# EAGLE board sht21_board_small (EAGLE 7.2.0)
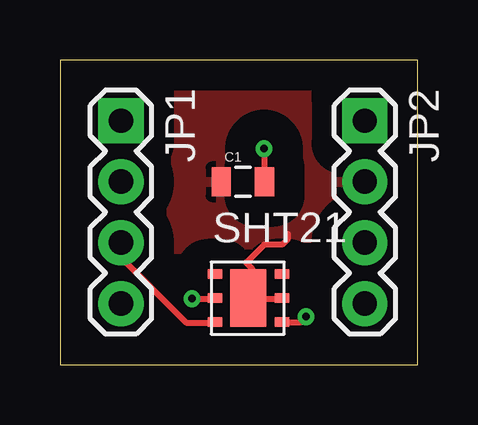
[diagram p0: board, top side]
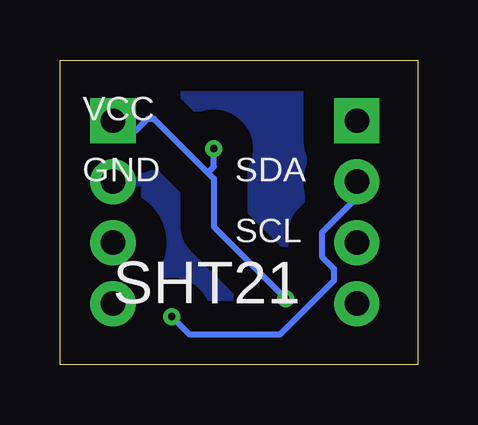
[diagram p1: board, bottom side, seen from below]

Size 14.91 x 12.69 mm. Coordinates in mm from the lower left corner, seen from the top.
Outline: 0,0 14.91,0 14.91,12.69 0,12.69 0,0
Copper layers (1*16): Top 0.035mm / dielectric 1.5mm / Bottom 0.035mm
Design rules "default *": minimum track width 0.25mm, minimum drill 0.3mm, track to track 0.25mm, track to pad 0.25mm, pad to pad 0.25mm, via to via 0.25mm, smd to smd 0.25mm, copper to edge 40mil, drill to drill 8mil, minimum pad ring 10mil, minimum via ring 8mil, stop-mask expansion 4mil, vias tented up to drill 0mil, thermal gap 10mil

## Footprints (pad centres in the part's own frame; a part is rotated, then mirrored left to right if it is on the bottom)
0805 = smd 0.8 x 1.2: 1 -0.9,0; 2 0.9,0
1X04 = drill 1.016 pad 1.88 square: 1 0,0 | drill 1.016 pad 1.88: 2 2.54,0; 3 5.08,0; 4 7.62,0
SHT21_PADS = smd 0.6 x 0.4: 1 2.9,0.5; 2 2.9,1.5; 3 2.9,2.5; 4 0.1,2.5; 5 0.1,1.5; 6 0.1,0.5 | smd 1.5 x 2.4: DIE_PAD 1.5,1.5

## Placement (x,y rotation side)
C1  10 uF  [0805]  7.62,7.62 0 top
JP1  [1X04]  2.54,10.16 270 top
JP2  [1X04]  12.7,10.16 270 top
U$1  SHT21  [SHT21_PADS]  6.35,1.27 0 top

## Library data of the parts
C1 = SparkFun-Passives
JP1 JP2 = SparkFun-Connectors
U$1 = sensors

## Nets
GND: C1.1 JP2.2 U$1.2 U$1.DIE_PAD
JP1.1: JP1.1
JP1.4: JP1.4
JP2.3: JP2.3
JP2.4: JP2.4
SCL: JP1.3 U$1.6
SDA: JP1.2 U$1.1
VCC: C1.2 JP2.1 U$1.5

## Tracks (layer width: path | path; a pad name or v marks a point on that pad's centre or on a via)
GND
  Top 0.25: U$1.2 9.25,2.75 8,2.75 U$1.DIE_PAD 8,3 8,4 7.75,4.25 8.5,5 9.25,5 9.5,5.25 9.5,5.44
  pour Top (isolate 1.27): 0,12.7 15.24,12.7 15.24,0 0,0
  pour Bottom (isolate 1.27): 0,12.7 0,0 15.24,0 15.24,12.7
SCL
  Top 0.25: U$1.6 6.25,1.75 5.25,1.75 2.75,4.25 2.75,5 JP1.3
SDA  (via drill 0.3)
  Top 0.25: v10.25,2 10,1.75 9.25,1.75 U$1.1
  Bottom 0.25: v10.25,2 9.5,1.25 5.75,1.25 3.5,3.5 3.5,4 4,4.5 4,5.5 2.75,6.75 2.75,7.5 JP1.2
VCC  (via drill 0.3)
  Top 0.25: v5.5,2.75 6.25,2.75 U$1.5 | v8.5,9 8.5,7.75 C1.2
  Bottom 0.25: v5.5,2.75 8.5,5.75 8.5,7.75 8.75,8 | 8.75,8 11,10.25 11.25,10.25 11.75,9.75 12.25,9.75 12.5,10 JP2.1 | v8.5,9 8.5,8.25 8.75,8

## Text on the board
bPlace: VCC | SDA | GND | SCL | SHT21